# EAGLE board cap-round (EAGLE 6.5.0)
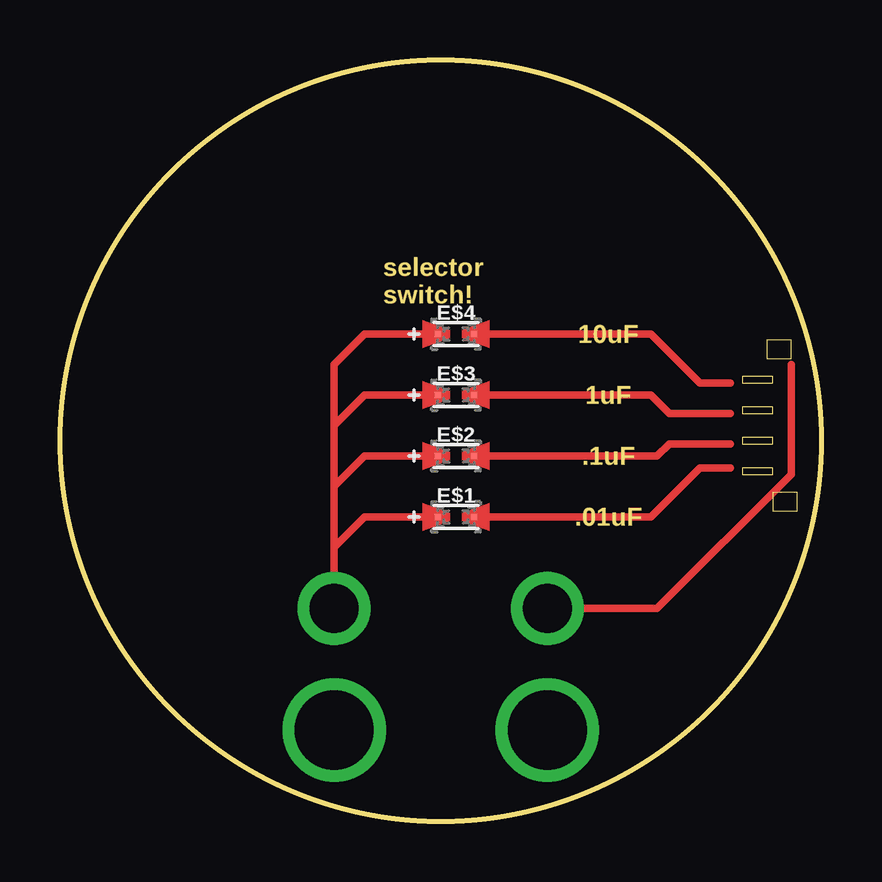
[diagram p0: board, top side]
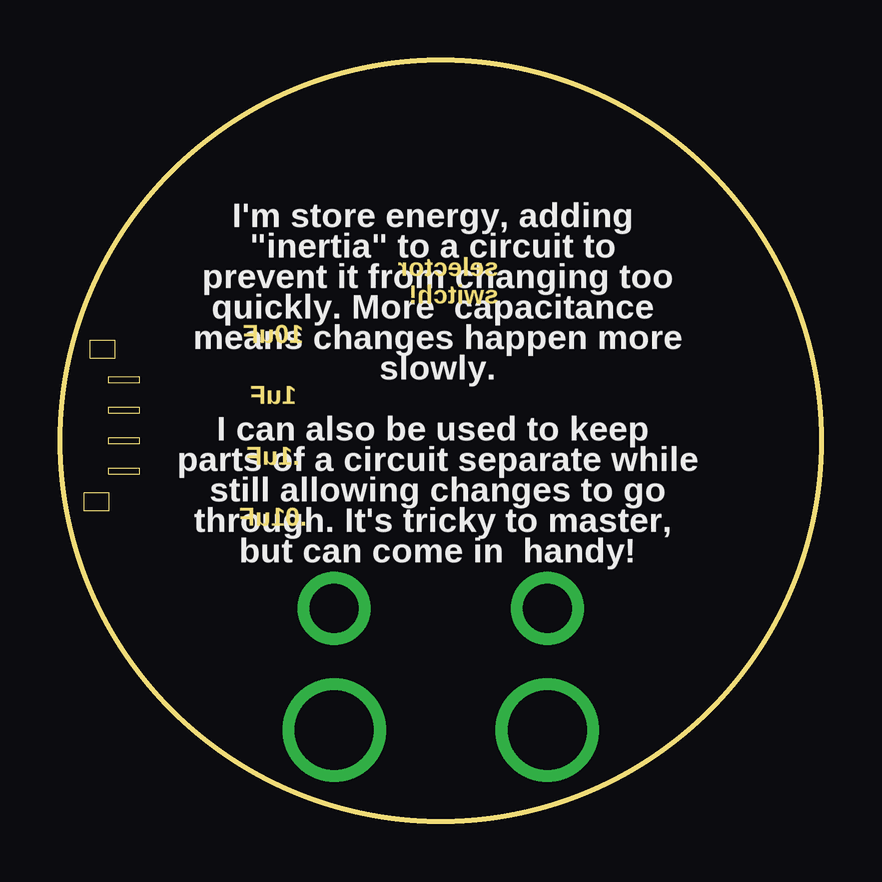
[diagram p1: board, bottom side, seen from below]

Size 31.75 x 31.75 mm. Coordinates in mm from the lower left corner, seen from the top.
Outline: circle at 15.88,15.88 radius 15.88
Copper layers (1*16): Top 0.035mm / dielectric 1.5mm / Bottom 0.035mm
Design rules "default": minimum track width 10mil, minimum drill 0.6mm, track to track 8mil, track to pad 8mil, pad to pad 8mil, via to via 8mil, smd to smd 8mil, copper to edge 40mil, drill to drill 8mil, minimum pad ring 10mil, minimum via ring 8mil, stop-mask expansion 4mil, vias tented up to drill 0mil, thermal gap 10mil

## Footprints (pad centres in the part's own frame; a part is rotated, then mirrored left to right if it is on the bottom)
0402-0603-0805-UNIVERSAL = smd 0.254 x 0.254: + -0.762,0; - 0.762,0

## Placement (x,y rotation side)
E$1  [0402-0603-0805-UNIVERSAL]  16.51,12.7 0 top
E$2  [0402-0603-0805-UNIVERSAL]  16.51,15.24 0 top
E$3  [0402-0603-0805-UNIVERSAL]  16.51,17.78 0 top
E$4  [0402-0603-0805-UNIVERSAL]  16.51,20.32 0 top

## Library data of the parts
E$1-E$4 = tekdemo

## Tracks (layer width: path | path; a pad name or v marks a point on that pad's centre or on a via)
S$1  (via drill 3.3)
  other vias: 11.43,3.81
S$2  (via drill 3.3)
  other vias: 20.32,3.81
S$3  (via drill 2.03)
  Top 0.305: v11.43,8.89 11.43,11.43 | 11.43,11.43 12.7,12.7 15.49,12.7 | 11.43,11.43 11.43,13.97 | 11.43,13.97 12.7,15.24 15.49,15.24 | 11.43,13.97 11.43,16.51 | 11.43,16.51 12.7,17.78 15.49,17.78 | 11.43,16.51 11.43,19.05 12.7,20.32 15.49,20.32
S$5
  Top 0.305: 17.78,20.32 24.64,20.32 26.67,18.29 27.94,18.29
S$6
  Top 0.305: 17.53,17.78 24.64,17.78 25.4,17.02 27.94,17.02
S$7
  Top 0.305: 17.53,15.24 24.89,15.24 25.4,15.75 27.94,15.75
S$8
  Top 0.305: 17.53,12.7 24.64,12.7 26.67,14.73 27.94,14.73
S$9  (via drill 2.03)
  Top 0.305: 30.48,19.05 30.48,14.48 24.89,8.89 v20.32,8.89

## Text on the board
Dimension: selector / switch! | 10uF | 1uF | .1uF | .01uF
bPlace: I'm store energy, adding / "inertia" to a circuit to / prevent it from changing too / quickly. More capacitance / means changes happen more / slowly. / / I can also be used to keep / parts of a circuit separate while / still allowing changes to go / through. It's tricky to master, / but can come in handy!
tDocu: http://www.digikey.com/product-search/en/switches/slide-switches/1115393